# EAGLE board GankenKunCircuit (EAGLE 9.4.0)
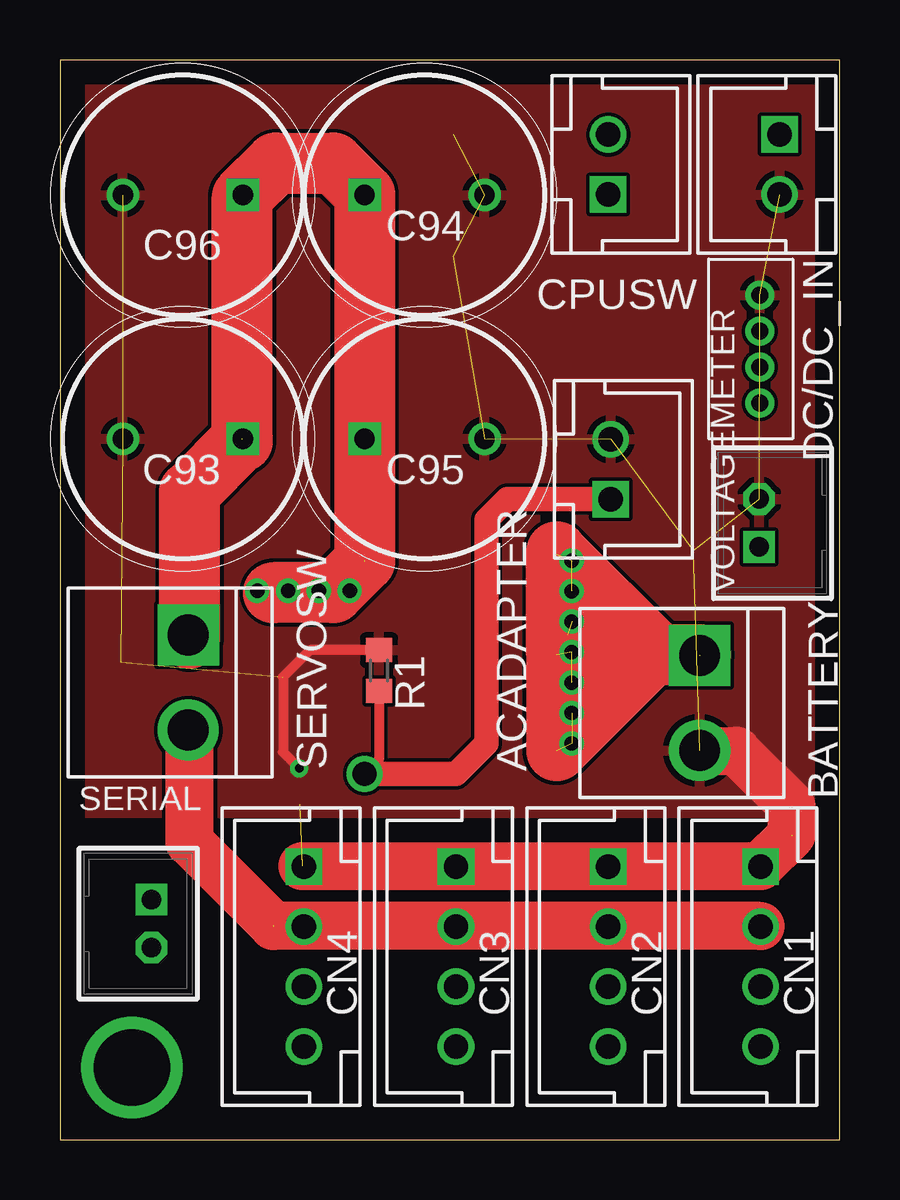
[diagram p0: board, top side]
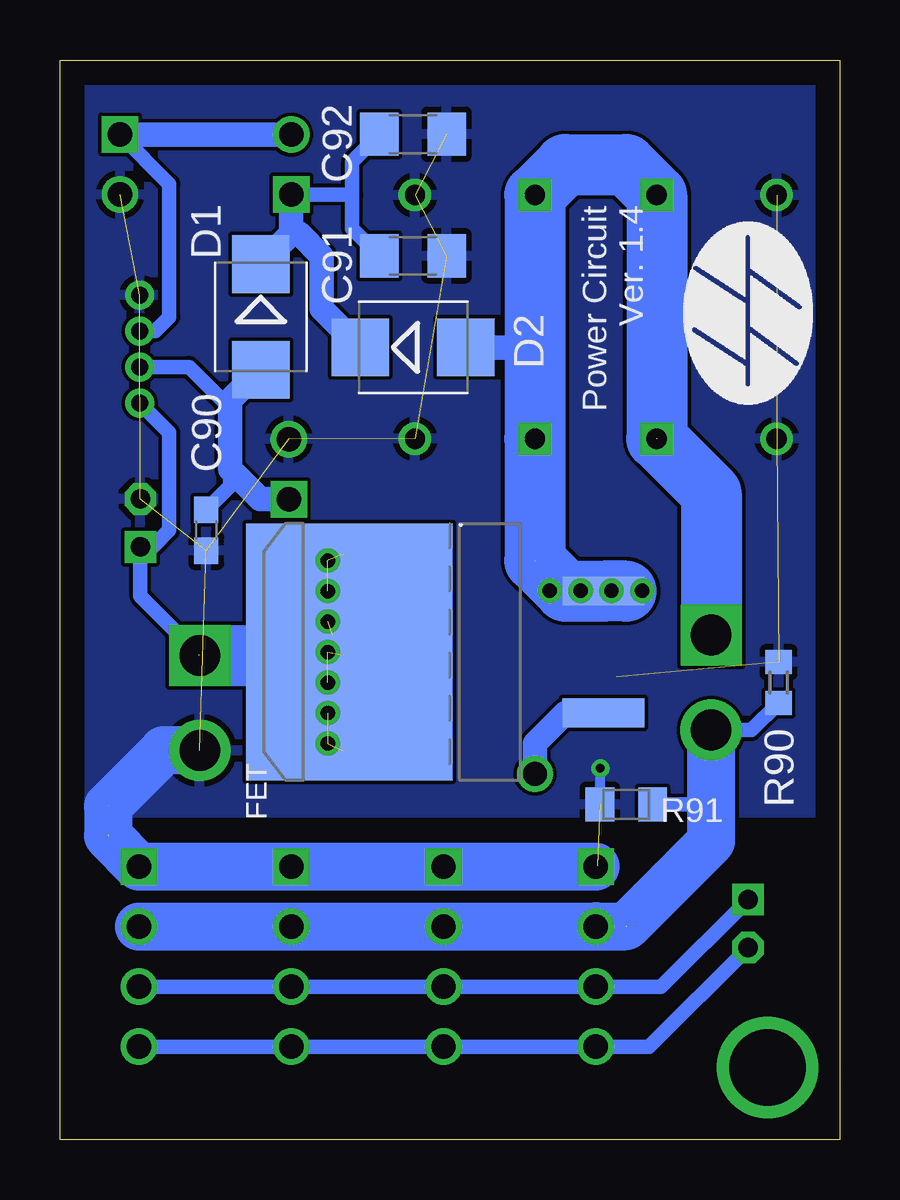
[diagram p1: board, bottom side, seen from below]

Size 32.5 x 45 mm. Coordinates in mm from the lower left corner, seen from the top.
Outline: 0,0 32.5,0 32.5,45 0,45 0,0
Copper layers (1*16): Top 0.035mm / dielectric 1.5mm / Bottom 0.035mm
Design rules "default": minimum track width 6mil, minimum drill 0.35mm, track to track 6mil, track to pad 6mil, pad to pad 6mil, via to via 6mil, smd to smd 6mil, copper to edge 40mil, drill to drill 6mil, minimum pad ring 10mil, minimum via ring 8mil, stop-mask expansion 4mil, vias tented up to drill 0mil, thermal gap 10mil

## Footprints (pad centres in the part's own frame; a part is rotated, then mirrored left to right if it is on the bottom)
B2B-XH-A = drill 1.016 square: 1 -1.25,0 | drill 1.016: 2 1.25,0
B2P-VH = drill 1.7 square: 1 -1.98,0 | drill 1.7: 2 1.98,0
C1608 = smd 1.1 x 1: 1 -0.85,0; 2 0.85,0
C3216 = smd 1.6 x 1.8: 1 -1.4,0; 2 1.4,0
CAPPRD500W65D1000H1350 = drill 0.85 pad 1.275 square: 1 0,0 | drill 0.85 pad 1.275: 2 5,0
B4B-XH-A = drill 1.016 square: 1 -3.75,0 | drill 1.016: 2 -1.25,0; 3 1.25,0; 4 3.75,0
SMB = smd 2.4 x 2.4: A 2.2,0; C -2.2,0
TO-263-2 = smd 1.2 x 3.4: 1 -2.54,-9.207; 3 2.54,-9.207 | smd 10.7 x 8.6: 4 0,1.393
B4B-ZR = drill 0.7: 1 6,-1.3; 2 4.5,-1.3; 3 3,-1.3; 4 1.5,-1.3
R0603 = smd 1 x 1.1: 1 -0.85,0; 2 0.85,0
CT/CN0805 = smd 1.2 x 1.4: 1 -1.1,0; 2 1.1,0
B2B-PH-K = drill 0.813 square: 1 -1,0 | drill 0.813 octagon: 2 1,0

## Placement (x,y rotation side)
ACADAPTER  [B2B-XH-A]  22.96,27.94 90 top
BATTERY  [B2P-VH]  26.67,18.2 270 top
C90  0.1u  [C1608]  26.4,25.4 270 bottom
C91  10u  [C3216]  17.78,36.83 0 bottom
C92  10u  [C3216]  17.78,41.91 0 bottom
C93  35SEPF120M  [CAPPRD500W65D1000H1350]  7.62,29.21 180 top
C94  35SEPF120M  [CAPPRD500W65D1000H1350]  12.7,39.37 0 top
C95  35SEPF120M  [CAPPRD500W65D1000H1350]  12.7,29.21 0 top
C96  35SEPF120M  [CAPPRD500W65D1000H1350]  7.62,39.37 180 top
CN1  [B4B-XH-A]  29.21,7.62 270 top
CN2  [B4B-XH-A]  22.86,7.62 270 top
CN3  [B4B-XH-A]  16.51,7.62 270 top
CN4  [B4B-XH-A]  10.16,7.62 270 top
CPUSW  [B2B-XH-A]  22.86,40.64 90 top
D1  [SMB]  24.13,34.29 270 bottom
D2  [SMB]  17.78,33.02 0 bottom
DC/DC_IN  [B2B-XH-A]  30,40.64 270 top
FET  SUM110P06-07L  [TO-263-2]  19.05,20.32 90 bottom
OTHER_BOARD  B4B-ZR  [B4B-ZR]  30.48,36.7 270 top
R1  10k  [R0603]  13.3,19.55 270 top
R90  10k  [R0603]  2.54,19.05 270 bottom
R91  VARISTORCN0805  [CT/CN0805]  8.89,13.97 180 bottom
SERIAL  B2B-PH-K  [B2B-PH-K]  3.81,9 270 top
SERVOSW  [B2P-VH]  5.35,19.05 270 top
VOLTAGEMETER  B2B-PH-K  [B2B-PH-K]  29.15,25.7 90 top

## Library data of the parts
ACADAPTER CN1-CN4 CPUSW DC/DC_IN = jst-xh
BATTERY SERVOSW = jst-vh
C90-C92 R1 R90 = rcl
C93-C96 = 35SEPF120M; DESCRIPTION: Panasonic 120uF 35 V dc Polymer Aluminium Capacitor F13, OS-CON Series 5000h 10 x 13mm; HEIGHT: 13.5mm; MANUFACTURER_NAME: Panasonic; MANUFACTURER_PART_NUMBER: 35SEPF120M; MOUSER_PART_NUMBER: 667-35SEPF120M; MOUSER_PRICE-STOCK: https://www.mouser.com/Search/Refine.aspx?Keyword=667-35SEPF120M; RS_PART_NUMBER: 1000082; RS_PRICE-STOCK: http://uk.rs-online.com/web/p/products/1000082
D1 D2 = diode
FET = SUM110P06-07L; AVAILABILITY: Unavailable; MF: Vishay; MP: SUM110P06-07L; PACKAGE: None; PRICE: None
OTHER_BOARD = jst
R91 = varistor
SERIAL VOLTAGEMETER = jst-ph

## Nets
GND: ACADAPTER.2 BATTERY.2 C90.2 C91.2 C92.2 C93.2 C94.2 C95.2 C96.2 CN1.1 CN2.1 CN3.1 CN4.1 DC/DC_IN.2 OTHER_BOARD.4 R1.1 R90.1 R91.2 VOLTAGEMETER.2
N$12: BATTERY.1 FET.4 OTHER_BOARD.1 VOLTAGEMETER.1
N$13: C93.1 C94.1 C95.1 C96.1 D2.A FET.3 SERVOSW.1
N$15: C91.1 C92.1 CPUSW.1 D1.C D2.C
N$16: ACADAPTER.1 C90.1 D1.A FET.1 OTHER_BOARD.2 R1.2
N$18: CPUSW.2 DC/DC_IN.1 OTHER_BOARD.3
RS485_A: CN1.3 CN2.3 CN3.3 CN4.3 SERIAL.1
RS485_B: CN1.4 CN2.4 CN3.4 CN4.4 SERIAL.2
VCC: CN1.2 CN2.2 CN3.2 CN4.2 R90.2 R91.1 SERVOSW.2

## Tracks (layer width: path | path; a pad name or v marks a point on that pad's centre or on a via)
GND  (via drill 0.35)  (15 unrouted)
  Top 0.406: R1.1 10.43,20.4 9.3,19.27 9.3,16.15 v9.97,15.47
  Top 2: 30.5,13.8 30.5,12.7 29.2,11.4 10.1,11.4 | 26.7,16.2 28.2,16.2 30.5,13.9
  Bottom 0.406: v9.97,15.47 9.99,15.46 R91.2
  Bottom 2: CN4.1 CN3.1 CN2.1 CN1.1 30.5,12.66 30.5,13.9 28.18,16.22 BATTERY.2
  pour Bottom: 0,45 0,13.62 32.5,13.62 32.5,45
  pour Top: 0,45 0,13.62 32.5,13.62 32.5,45
N$6  (via drill 3.2 pad 3.2)
  other vias: 3,3
N$12  (via drill 0.6)  (8 unrouted)
  Top 2.54: 24.7,20.2 20.7,20.2 | 20.7,20.2 20.7,24.4 | 20.7,20.2 20.7,16.2 24.7,20.2 | 24.7,20.2 25,20.2 | 26.7,20.2 25,20.2 | 25,20.2 20.7,24.5
  Bottom 0.61: BATTERY.1 29.15,22.66 VOLTAGEMETER.1 28.64,24.7 27.94,25.4 27.94,29.46 OTHER_BOARD.1
  Bottom 2.54: 21.15,21.03 FET.4 20.58,20.18 BATTERY.1
  other vias: 21.34,24.13 21.34,22.86 21.34,21.59 21.34,20.32 21.34,19.05 21.34,17.78 21.34,16.51
N$13  (via drill 0.6)  (2 unrouted)
  Top 2.54: 7.6,29.1 7.6,39.3 9,40.7 11.4,40.7 12.7,39.4 12.7,24.1 11.4,22.8 8.9,22.8 | 5.4,20.9 5.4,27 7.6,29.2
  Bottom 0.406: v8.22,22.87 8.24,22.86 FET.3 | 11.43,22.86 12.07,22.86 v12.08,22.87 | FET.3 9.52,22.86 v9.51,22.87 | FET.3 9.86,22.87 v10.79,22.87
  Bottom 1.016: D2.A 12.7,33.02
  Bottom 2.54: SERVOSW.1 5.35,26.94 C93.1 C96.1 8.89,40.64 11.43,40.64 C94.1 12.7,33.02 C95.1 12.7,24.13 11.43,22.86 FET.3 8.89,22.86
N$15
  Bottom 0.61: C91.1 20.32,37.97 20.32,39.37 | C92.1 20.32,40.77 20.32,39.37 | 20.32,39.37 20.34,39.39 CPUSW.1
  Bottom 1.016: D1.C 22.86,37.76 | 22.86,37.76 CPUSW.1 | D2.C 21.59,34.63 21.59,36.83 22.52,37.76 22.86,37.76
N$16  (via drill 1)
  Top 0.406: R1.2 13.3,15.84 v12.7,15.24
  Top 1.016: 12.72,15.24 v12.7,15.24 16.51,15.24 17.78,16.51 17.78,25.83 18.65,26.7 ACADAPTER.1
  Bottom 0.61: C90.1 25.4,27.25 25.4,27.94 | OTHER_BOARD.2 27.12,32.2 25.74,30.82 25.4,30.82
  Bottom 1.016: FET.1 11.43,17.78 12.7,16.51 v12.7,15.24 | ACADAPTER.1 24.15,26.69 25.4,27.94 25.4,30.82 D1.A
N$18
  Bottom 0.61: DC/DC_IN.1 27.94,39.83 27.94,34.29 28.53,33.7 OTHER_BOARD.3
  Bottom 1.016: CPUSW.2 DC/DC_IN.1
RS485_A
  Bottom 0.61: CN1.3 CN2.3 CN3.3 CN4.3 7.44,6.37 SERIAL.1
RS485_B
  Bottom 0.61: CN1.4 CN2.4 CN3.4 CN4.4 7.94,3.87 SERIAL.2
VCC  (1 unrouted)
  Top 2: 29.2,8.9 8.9,8.9 5.4,12.4 5.4,17.1
  Bottom 0.61: R91.1 5.35,13.97 | R90.2 3.67,17.07 SERVOSW.2
  Bottom 2: SERVOSW.2 5.35,13.97 5.35,12.43 8.89,8.89 10.14,8.89 CN4.2 CN3.2 CN2.2 CN1.2

## Text on the board
bPlace: Power Circuit / Ver. 1.4